# Altium PCB HS100B_PCB.PcbDoc
Units mil, origin at the board's own origin, x right, y up, seen from the top; angles counter-clockwise.
Board outline not stored, 2 copper layers (Top Layer, Bottom Layer); 46 components, 0 nets, 151 pads, 0 vias.
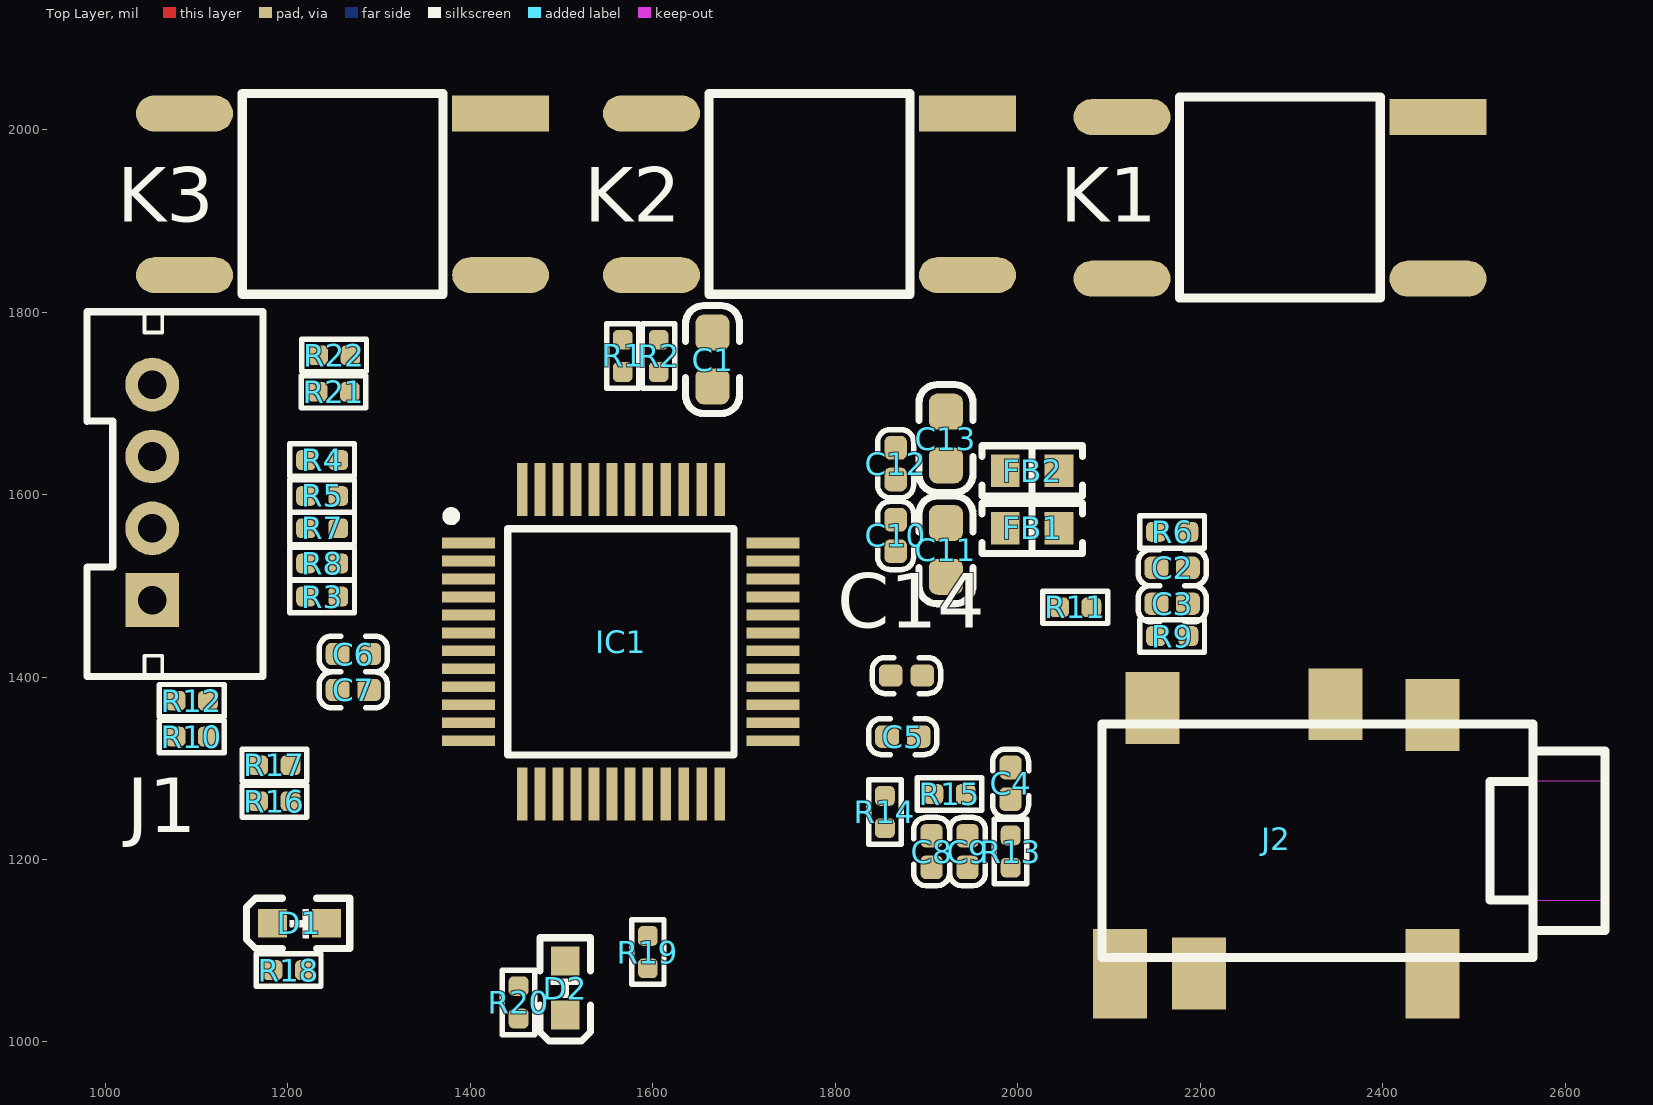
[diagram p0: Top Layer view]
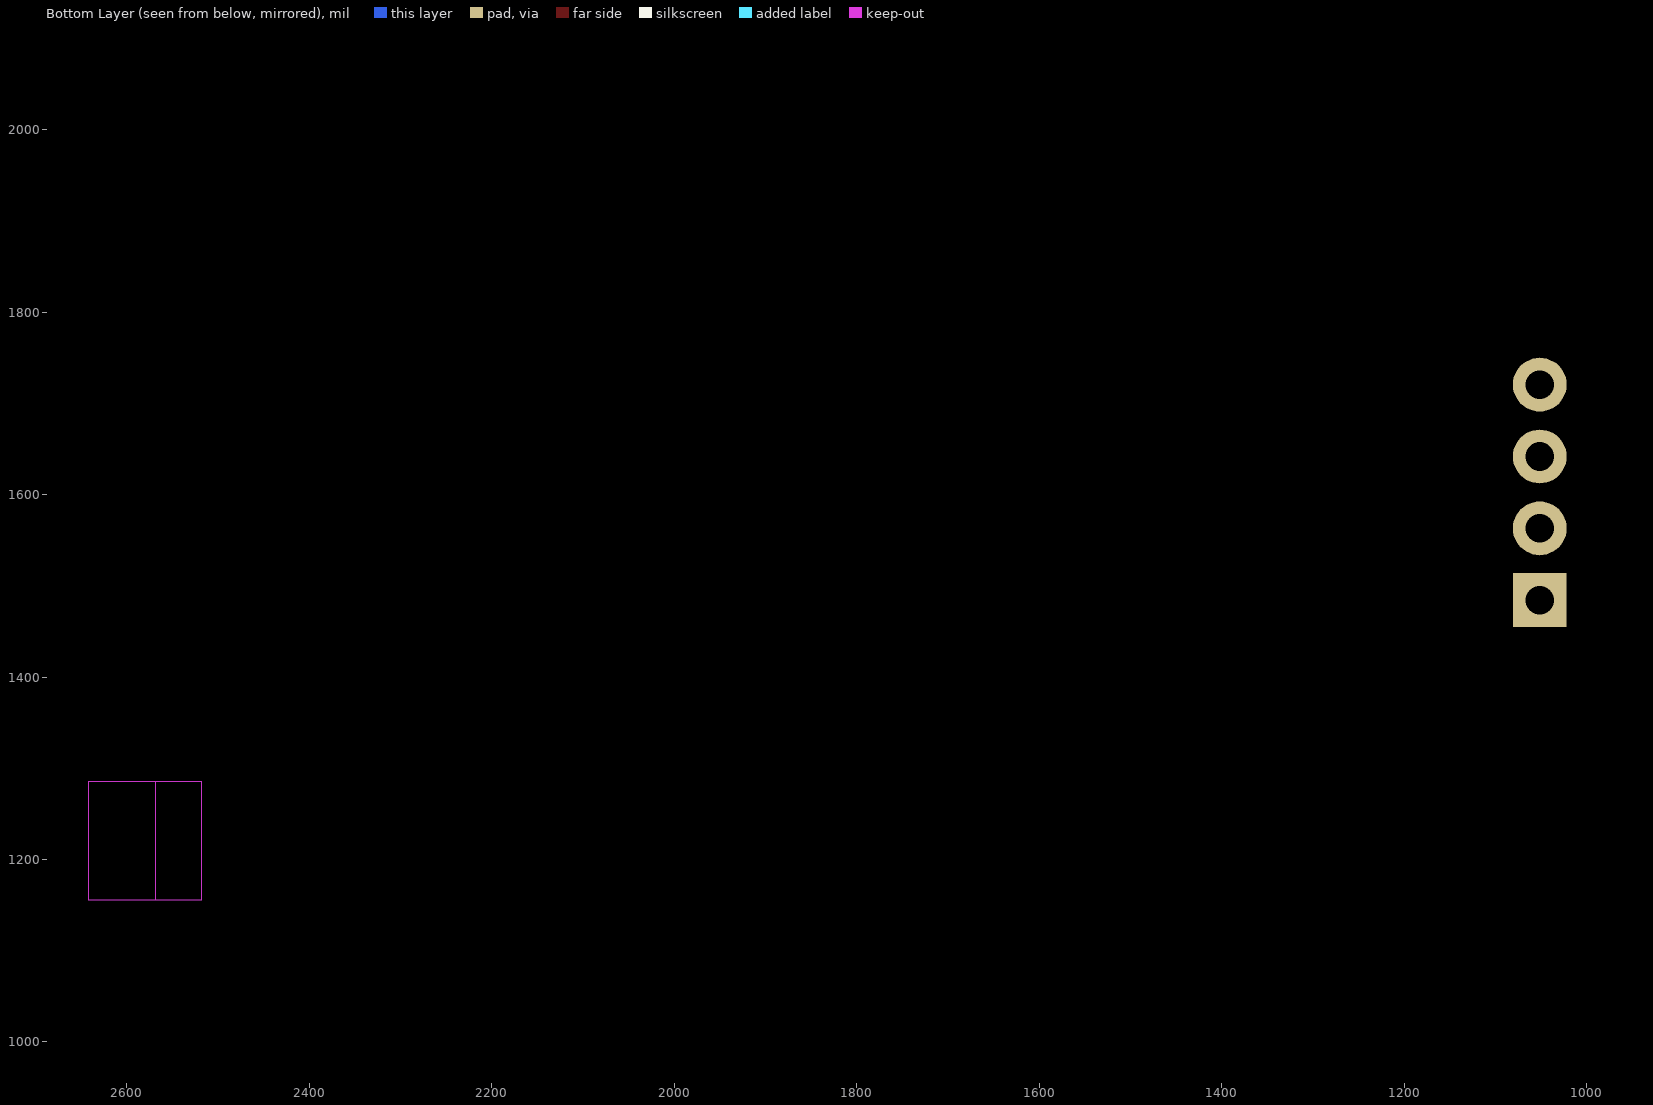
[diagram p1: Bottom Layer view, seen from below]

## Layer stack, top to bottom
Top Solder: solder mask 0.4, Solder Resist, Dk 3.5
Top Layer: signal copper 1.4
Dielectric 1: dielectric 12.6, FR-4, Dk 4.8
Bottom Layer: signal copper 1.4
Bottom Solder: solder mask 0.4, Solder Resist, Dk 3.5

## Components (designator, comment, footprint, x,y, rotation, side; value= is the part's Value field where it differs from the comment)
C1 "4.7uF" C_0603 1665.35,1748.03 r90 top
C2 "10uF" C_0402 2169.29,1519.68 r0 top
C3 "10uF" C_0402 2169.29,1480.32 r0 top
C4 "1uF" C_0402 1992.13,1283.46 r270 top
C5 "1uF" C_0402 1874.02,1334.65 r0 top
C6 "1uF" C_0402 1271.65,1425.2 r180 top
C7 "1uF" C_0402 1271.65,1385.83 r180 top
C8 "4.7uF" C_0402 1905.51,1208.66 r270 top
C9 "100pF" C_0402 1944.88,1208.66 r270 top
C10 "100nF" C_0402 1866.14,1555.12 r270 top
C11 "10uF" C_0603 1921.26,1539.37 r270 top
C12 "100nF" C_0402 1866.14,1633.86 r90 top
C13 "10uF" C_0603 1921.26,1661.42 r90 top
C14 "100nF" C_0402 1877.95,1401.57 r0 top
D1 "Green" LED-0603-G 1212.6,1129.92 r180 top
D2 "Red" LED-0603-R 1503.94,1059.06 r270 top
FB1 "120Ω/100MHz/1A" FB_0603 2015.75,1562.99 r0 top
FB2 "120Ω/100MHz/1A" FB_0603 2015.75,1625.98 r0 top
IC1 "HS-100B" QFP50P900X900X160-48N 1564.96,1438.5 r0 top locked
J1 "PH_2.0-4P" PH2.0-4P 1051.18,1602.36 r90 top
J2 "PJ-316A-6A" PJ-316A-6A 2283.46,1220.47 r270 top
K1 "KEY" SMD-6X6X5 2287.4,1925.2 r180 top
K2 "KEY" SMD-6X6X5 1771.65,1929.13 r180 top
K3 "KEY" SMD-6X6X5 1259.84,1929.13 r180 top
R1 "10kΩ" R_0402 1566.93,1751.97 r90 top
R2 "1kΩ" R_0402 1606.3,1751.97 r90 top
R3 "1kΩ" R_0402 1237.45,1488.19 r0 top
R4 "1kΩ" R_0402 1237.45,1637.8 r0 top
R5 "1kΩ" R_0402 1237.45,1598.43 r0 top
R6 "1kΩ" R_0402 2169.29,1559.06 r180 top
R7 "1kΩ" R_0402 1237.45,1562.99 r0 top
R8 "1kΩ" R_0402 1237.45,1524.45 r0 top
R9 "1kΩ" R_0402 2169.29,1444.88 r180 top
R10 "1kΩ" R_0402 1094.49,1334.65 r0 top
R11 "0Ω" R_0402 2062.99,1476.38 r0 top
R12 "10kΩ" R_0402 1094.49,1374.02 r0 top
R13 "8.2kΩ" R_0402 1992.13,1208.66 r270 top
R14 "2.2kΩ" R_0402 1854.33,1251.97 r270 top
R15 "8.2kΩ" R_0402 1925.2,1271.65 r0 top
R16 "1kΩ" R_0402 1185.04,1263.78 r0 top
R17 "10kΩ" R_0402 1185.04,1303.15 r0 top
R18 "1kΩ" R_0402 1200.79,1078.74 r180 top
R19 "1kΩ" R_0402 1594.49,1098.43 r90 top
R20 "1kΩ" R_0402 1452.76,1043.31 r270 top
R21 "22Ω" R_0402 1250,1712.6 r0 top
R22 "22Ω" R_0402 1250.63,1752.61 r0 top

## Footprints (in the part's own frame and the unit in brackets; to place one, negate y for a bottom-side part, rotate by r counter-clockwise, add the part's x,y. Pads: shape width x height; smd on the part's side, far side on the other; paste and mask are expansions set on the pad)
C_0402 [mm] "Chip Capacitor, 2-Leads, Body 1.00x0.50mm, IPC Medium Density"
  rrect50% 0.66x0.62 smd: 1(-0.44,0) 2(0.44,0)
  silkscreen extent -0.95,-0.5 0.95,0.5, body extent -0.52,-0.27 0.53,0.28, height 0.55
C_0603 [mm] "Chip Capacitor, 2-Leads, Body 1.60x0.80mm, IPC Medium Density"
  rrect50% 1x0.95 smd: 1(-0.75,0) 2(0.75,0)
  silkscreen extent -1.5,-0.75 1.5,0.75, body extent -0.8,-0.4 0.8,0.4, height 0.87
FB_0603 [mm] "Chip Inductor, 2-Leads, Body 1.55x0.80mm, IPC Medium Density"
  rect 0.8x0.9 smd: 1(-0.75,0) 2(0.75,0)
  silkscreen extent -1.4,-0.7 1.4,0.7, body extent -0.8,-0.42 0.8,0.38, height 0.8
LED-0603-G [mm] "Chip Diode, 2-Leads, Body 1.55x0.80mm, IPC Medium Density"
  rect 0.8x0.8 smd: A(-0.75,0) K(0.75,0)
  silkscreen extent -1.4,-0.7 1.48,0.7, body extent -0.8,-0.4 0.8,0.4, height 0.61
LED-0603-R [mm] "Chip Diode, 2-Leads, Body 1.55x0.80mm, IPC Medium Density"
  rect 0.8x0.8 smd: A(-0.75,0) K(0.75,0)
  silkscreen extent -1.4,-0.7 1.48,0.7, body extent -0.76,-0.4 0.84,0.4, height 0.61
PH2.0-4P [mm]
  rect 1.5x1.5 hole 0.8: 1(-3,0)
  round 1.5 hole 0.8: 2(-1,0) 3(1,0) 4(3,0)
  silkscreen extent -5.13,-3.08 5.03,1.82, body extent -4.93,-3.01 4.97,1.69, height 6.01
PJ-316A-6A [mm]
  rect 2x1.5 smd: 1(-3.5,4.35) 2(3.7,-2.15) 3(-3.8,1.65) 6(-3.7,-3.45)
  rect 2.5x1.5 smd: 4(3.7,4.35) 5(3.7,-4.35)
  round 1.1 hole 1.3 unplated: ""(0,-3.429)
  Keep-Out Layer board cut-out: -1.651,5.969 1.651,5.969 1.651,7.239 -1.651,7.239
  Keep-Out Layer board cut-out: -1.651,5.969 1.651,5.969 1.651,9.098 -1.651,9.098
  silkscreen extent -3.25,-4.85 3.25,9.15, body extent -4.05,-4.9 4.25,9.1, height 4.4
QFP50P900X900X160-48N [mm]
  rect 1.475x0.3 smd: 1(-4.238,2.75) 2(-4.238,2.25) 3(-4.238,1.75) 4(-4.238,1.25) 5(-4.238,0.75) 6(-4.238,0.25) 7(-4.238,-0.25) 8(-4.238,-0.75) 9(-4.238,-1.25) 10(-4.238,-1.75) 11(-4.238,-2.25) 12(-4.238,-2.75) 25(4.238,-2.75) 26(4.238,-2.25) 27(4.238,-1.75) 28(4.238,-1.25) 29(4.238,-0.75) 30(4.238,-0.25) 31(4.238,0.25) 32(4.238,0.75) 33(4.238,1.25) 34(4.238,1.75) 35(4.238,2.25) 36(4.238,2.75)
  rect 0.3x1.475 smd: 13(-2.75,-4.238) 14(-2.25,-4.238) 15(-1.75,-4.238) 16(-1.25,-4.238) 17(-0.75,-4.238) 18(-0.25,-4.238) 19(0.25,-4.238) 20(0.75,-4.238) 21(1.25,-4.238) 22(1.75,-4.238) 23(2.25,-4.238) 24(2.75,-4.238) 37(2.75,4.238) 38(2.25,4.238) 39(1.75,4.238) 40(1.25,4.238) 41(0.75,4.238) 42(0.25,4.238) 43(-0.25,4.238) 44(-0.75,4.238) 45(-1.25,4.238) 46(-1.75,4.238) 47(-2.25,4.238) 48(-2.75,4.238)
  silkscreen extent -4.85,-3.15 3.15,3.62, body extent -4.5,-4.5 4.5,4.5, height 1.6
R_0402 [mm] "Chip Resistor, 2-Leads, Body 1.00x0.50mm, IPC Medium Density"
  rrect50% 0.55x0.55 smd: 1(-0.45,0) 2(0.45,0)
  silkscreen extent -0.9,-0.45 0.9,0.45, body extent -0.5,-0.27 0.5,0.28, height 0.4
SMD-6X6X5 [mm]
  rect 2.7x1 smd: 1(-4.4,-2.25)
  oval 2.7x1 smd: 2(4.4,-2.25) 3(-4.4,2.25) 4(4.4,2.25)
  silkscreen extent -2.79,-2.8 2.79,2.78, body extent -4.5,-2.96 4.5,3.04, height 4.95

## Part data
C1 C2 C3 C4 C5 C6 C7 C8 C9 C10 C11 C12 C13 C14: library part Cap_Chip, "贴片电容"
D1 D2: library part LED_Chip, "贴片LED"
FB1 FB2: library part Filter_FB, "磁珠"
IC1: "Integrated Circuit", Manufacturer_Name=cmedia, Datasheet Link=https://datasheet.lcsc.com/szlcsc/1906061502_Cmedia-HS-100B_C371351.pdf, Height=1.6mm, Manufacturer_Part_Number=HS-100B
J2: library part Audio_PJ-316A-6A, "3.5音频链接座子", BOM_Manufacturer=HRO, BOM_Manufacturer Part=PJ-316A-6A
K1 K2 K3: "轻触开关"
R1 R2 R3 R4 R5 R6 R7 R8 R9 R10 R11 R12 R13 R14 R15 R16 R17 R18 R19 R20 R21 R22: library part Res_Chip, "贴片电阻"

## Nets (pads, with @x,y where several pads share a name; then routed paths per layer and width w, separated by ;. In a path a pad name is that pad's centre, name@x,y a point inside that pad or via, vN(x,y) a via of type N, cw(c..) or ccw(c..) an arc to the next point about the centre after c; other vN are vias at no path point)
pads on no net: C1.1 C1.2 C2.1 C2.2 C3.1 C3.2 C4.1 C4.2 C5.1 C5.2 C6.1 C6.2 C7.1 C7.2 C8.1 C8.2 C9.1 C9.2 C10.1 C10.2 C11.1 C11.2 C12.1 C12.2 C13.1 C13.2 C14.1 C14.2 D1.A D1.K D2.A D2.K FB1.1 FB1.2 FB2.1 FB2.2 IC1.1 IC1.2 IC1.3 IC1.4 IC1.5 IC1.6 IC1.7 IC1.8 IC1.9 IC1.10 IC1.11 IC1.12 IC1.13 IC1.14 IC1.15 IC1.16 IC1.17 IC1.18 IC1.19 IC1.20 IC1.21 IC1.22 IC1.23 IC1.24 IC1.25 IC1.26 IC1.27 IC1.28 IC1.29 IC1.30 IC1.31 IC1.32 IC1.33 IC1.34 IC1.35 IC1.36 IC1.37 IC1.38 IC1.39 IC1.40 IC1.41 IC1.42 IC1.43 IC1.44 IC1.45 IC1.46 IC1.47 IC1.48 J1.1 J1.2 J1.3 J1.4 J2. J2.1 J2.2 J2.3 J2.4 J2.5 J2.6 K1.1 K1.2 K1.3 K1.4 K2.1 K2.2 K2.3 K2.4 K3.1 K3.2 K3.3 K3.4 R1.1 R1.2 R2.1 R2.2 R3.1 R3.2 R4.1 R4.2 R5.1 R5.2 R6.1 R6.2 R7.1 R7.2 R8.1 R8.2 R9.1 R9.2 R10.1 R10.2 R11.1 R11.2 R12.1 R12.2 R13.1 R13.2 R14.1 R14.2 R15.1 R15.2 R16.1 R16.2 R17.1 R17.2 R18.1 R18.2 R19.1 R19.2 R20.1 R20.2 R21.1 R21.2 R22.1 R22.2

## Text inside footprints (layer, text, board x,y; h text height)
J2: Mechanical 4 "CNC" at 2528.46,1190.47 h80